# EAGLE board Arduino_lab_v1.2.brd.2 (EAGLE 7.2.0), part 1 of 2
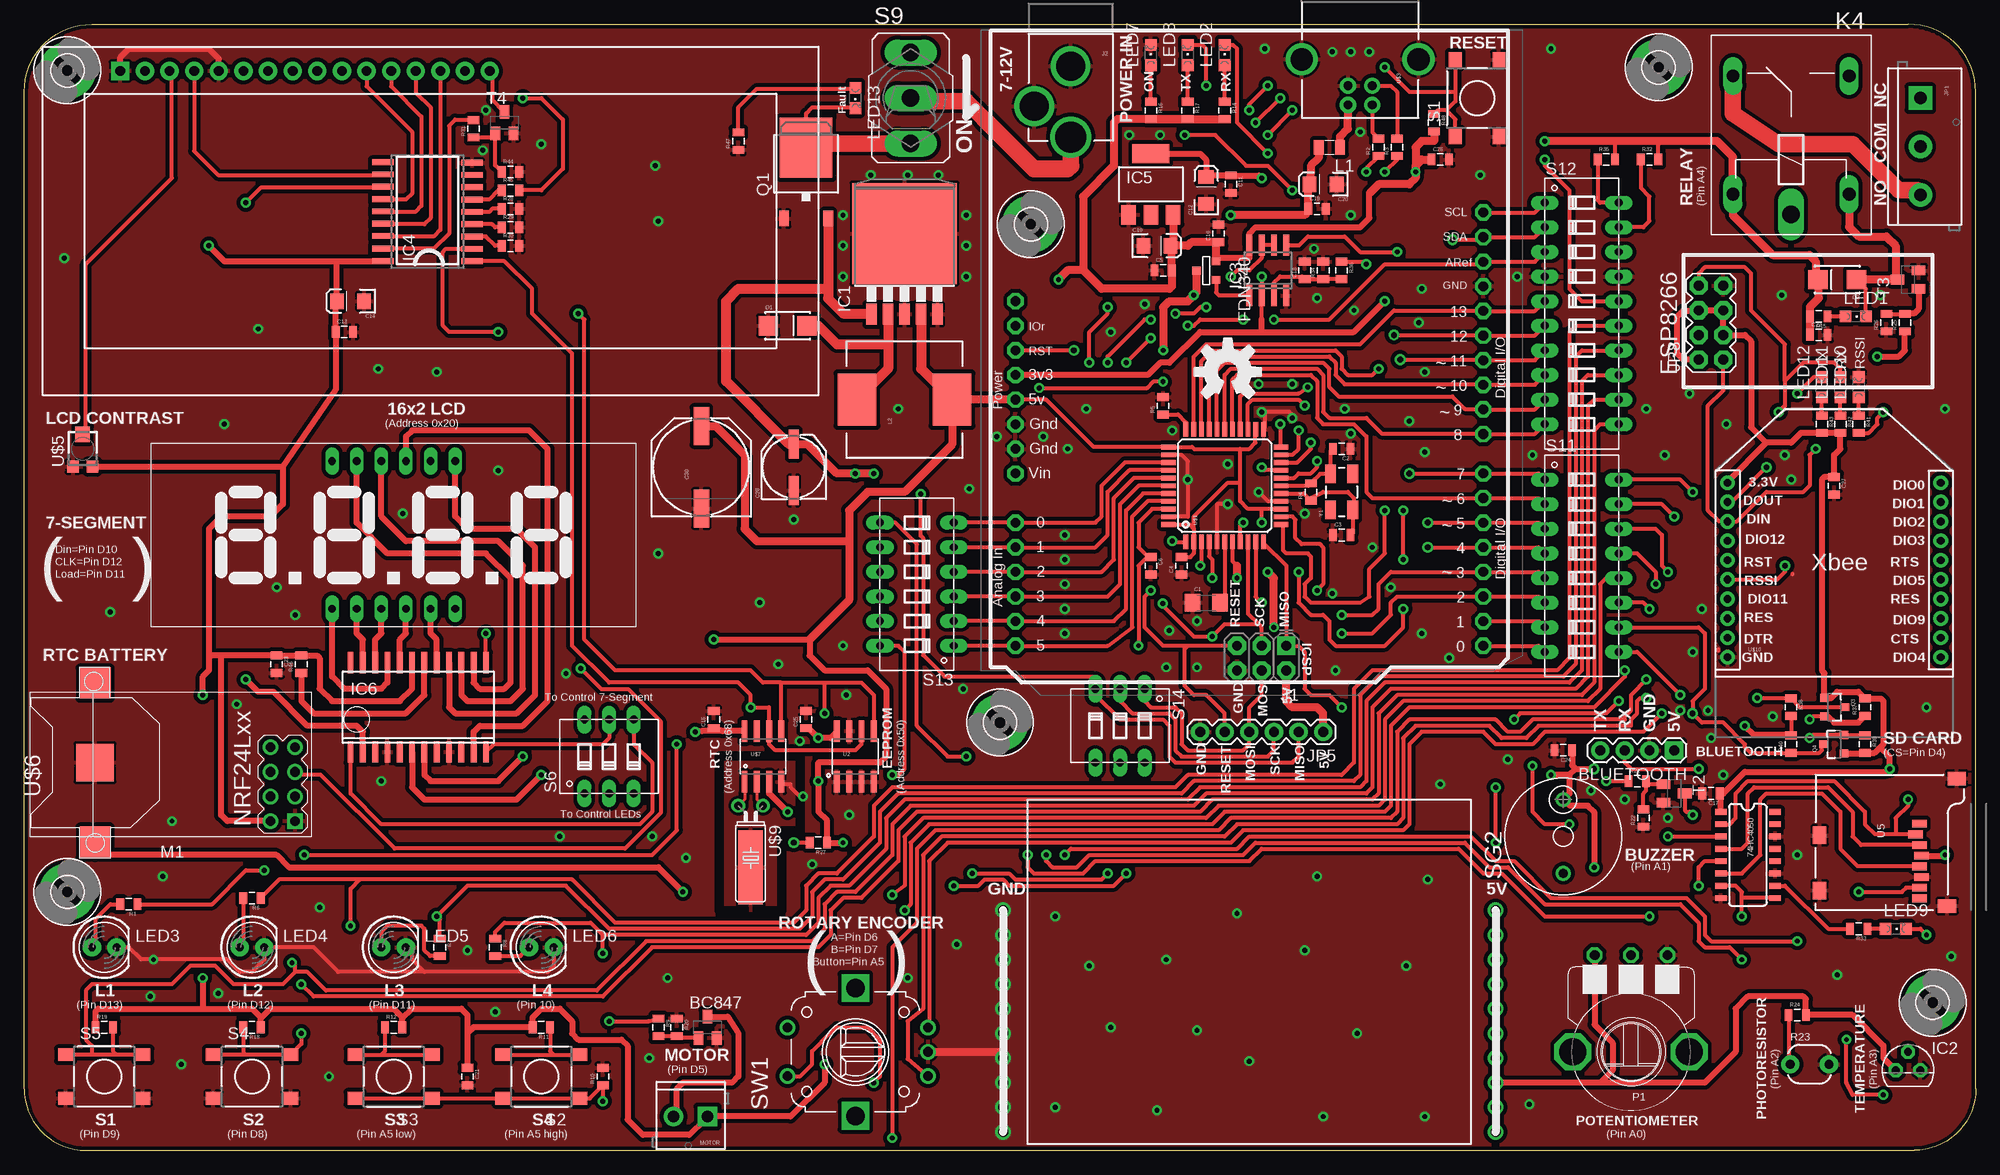
[diagram p0: board, top side]
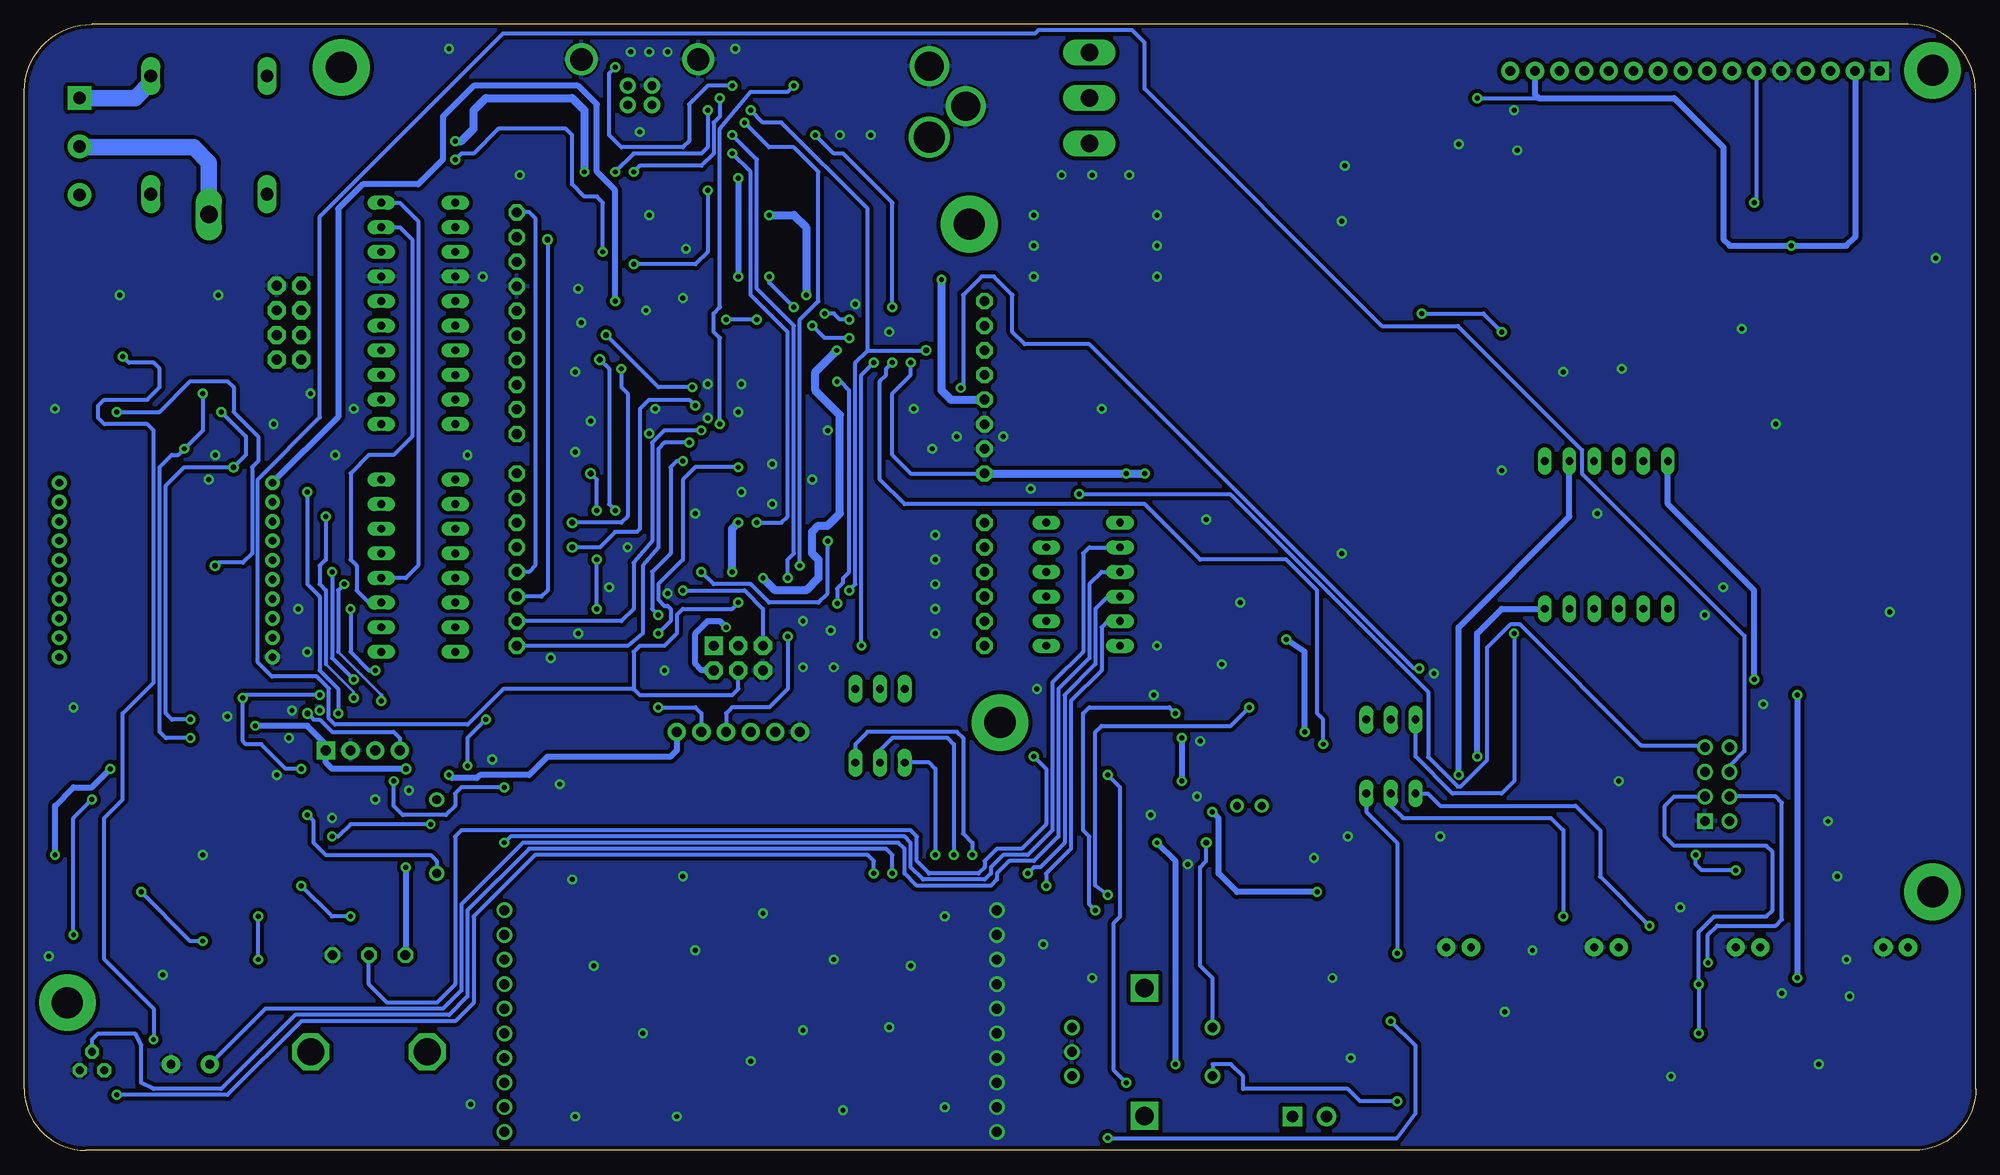
[diagram p1: board, bottom side, seen from below]

Size 201.29 x 116.2 mm. Coordinates in mm from the lower left corner, seen from the top.
Outline: 201.28,6.35 201.28,109.52
Outline: 201.29,6.35 arc-90 194.94,0 6.35,0 arc-90 0,6.35 0,109.22 arc-90 6.99,116.2 194.31,116.2 arc-90 201.29,109.22
Copper layers (1*16): Top 0.035mm / dielectric 1.5mm / Bottom 0.035mm
Design rules "default": minimum track width 16mil, minimum drill 20mil, track to track 8mil, track to pad 12mil, pad to pad 8mil, via to via 8mil, smd to smd 8mil, copper to edge 10mil, drill to drill 8mil, minimum pad ring 12mil, minimum via ring 10mil, stop-mask expansion 4mil, vias tented up to drill 25mil, thermal gap 10mil
tRestrict: 7 lines

## Footprints (pad centres in the part's own frame; a part is rotated, then mirrored left to right if it is on the bottom)
SO016 = smd 0.6 x 1.2: 1 -4.445,-2.8; 2 -3.175,-2.8; 3 -1.905,-2.8; 4 -0.635,-2.8; 5 0.635,-2.8; 6 1.905,-2.8; 7 3.175,-2.8; 8 4.445,-2.8; 9 4.445,2.8; 10 3.175,2.8; 11 1.905,2.8; 12 0.635,2.8; 13 -0.635,2.8; 14 -1.905,2.8; 15 -3.175,2.8; 16 -4.445,2.8
SOT23-BEC = smd 1 x 1.4: B -0.95,-1.1; C 0,1.1; E 0.95,-1.1
1X04 = drill 1.016 pad 1.88 square: 1 0,0 | drill 1.016 pad 1.88: 2 2.54,0; 3 5.08,0; 4 7.62,0
1206 = smd 1.6 x 1.8: 1 -1.4,0; 2 1.4,0
0805 = smd 0.8 x 1.2: 1 -0.9,0; 2 0.9,0
EIA3216 = smd 1.4 x 1.6: A 1.4,0; C -1.4,0
NIPPON_F80 = smd 2.95 x 1: + 2.4,0; - -2.4,0
PANASONIC_G = smd 3.9 x 1.6: + 4.25,0; - -4.25,0
SMA-DIODE_ALT = smd 2 x 2: A -2,0; C 2,0
SOT-23 = smd 0.787 x 0.889: 1 0.025,-1.016; 2 -0.94,1.016; 3 0.991,1.016
3,2-PAD = drill 3.2 pad 5.842: B3,2 0,0
TO263-5 = smd 1.067 x 2.159: 1 -3.404,-5.791; 2 -1.702,-5.791; 3 0,-5.791; 4 1.702,-5.791; 5 3.404,-5.791 | smd 10.8 x 10.41: GND 0,2.54
TO92 = drill 0.813 octagon: 1 -1.27,0; 2 0,1.905; 3 1.27,0
SO08 = smd 0.6 x 2.2: 1 -1.905,-2.6; 2 -0.635,-2.6; 3 0.635,-2.6; 4 1.905,-2.6; 5 1.905,2.6; 6 0.635,2.6; 7 -0.635,2.6; 8 -1.905,2.6
SO18W = smd 0.6 x 2.2: 1 -4.445,-4.6; 2 -3.175,-4.6; 3 -1.905,-4.6; 4 -0.635,-4.6; 5 0.635,-4.6; 6 1.905,-4.6; 7 3.175,-4.6; 8 4.445,-4.6; 9 5.715,-4.6; 10 5.775,4.6; 11 4.505,4.6; 12 3.235,4.6; 13 1.965,4.6; 14 0.695,4.6; 15 -0.575,4.6; 16 -1.845,4.6; 17 -3.145,4.6; 18 -4.445,4.6
SOT223 = smd 1.5 x 2: 1 -2.3,-3.15; 2 0,-3.15; 3 2.3,-3.15 | smd 3.8 x 2: 4 0,3.15
SO24W = smd 0.6 x 2.2: 1 -6.985,-4.6; 2 -5.715,-4.6; 3 -4.445,-4.6; 4 -3.175,-4.6; 5 -1.905,-4.6; 6 -0.635,-4.6; 7 0.635,-4.6; 8 1.905,-4.6; 9 3.175,-4.6; 10 4.445,-4.6; 11 5.715,-4.6; 12 6.985,-4.6; 13 6.985,4.6; 14 5.715,4.6; 15 4.445,4.6; 16 3.175,4.6; 17 1.905,4.6; 18 0.635,4.6; 19 -0.635,4.6; 20 -1.905,4.6; 21 -3.175,4.6; 22 -4.445,4.6; 23 -5.715,4.6; 24 -6.985,4.6
2X3-NS = drill 1.016 pad 1.88 square: 1 -2.54,-1.27 | drill 1.016 pad 1.88 octagon: 2 -2.54,1.27; 3 0,-1.27; 4 0,1.27; 5 2.54,-1.27; 6 2.54,1.27
POWER_JACK_PTH_LOCK = drill 2.997 pad 4.115: GND 0.025,6.557; GNDBREAK 3.762,10.7 | drill 3.2 pad 4.115: PWR 0,13.878
SCREWTERMINAL-5MM-3 = drill 1.3 pad 2.413 square: 1 0,0 | drill 1.3 pad 2.413: 2 5,0; 3 10,0
1X06 = drill 1.016 pad 1.88: 1 0,0; 2 2.54,0; 3 5.08,0; 4 7.62,0; 5 10.16,0; 6 12.7,0
2X4 = drill 1.016 pad 1.88 octagon: 1 -3.81,-1.27; 2 -3.81,1.27; 3 -1.27,-1.27; 4 -1.27,1.27; 5 1.27,-1.27; 6 1.27,1.27; 7 3.81,-1.27; 8 3.81,1.27
ZF112 = drill 1.321 long: 1 -6.096,5.994; 2 -6.096,-5.994; O 6.096,5.994; S 6.096,-5.994 | drill 1.803 long: P -8.204,0
PTC0805 = smd 1 x 1.5: 1 -1.1,0; 2 1.1,0
CDRH125 = smd 5.4 x 4: 1 0,4.9; 2 0,-4.9
CHIPLED_0805 = smd 1.2 x 1.2: A 0,-1.05; C 0,1.05
LED5MM = drill 0.813 pad 1.88: A -1.27,0; K 1.27,0
WIRELESS-NRF24L01 = drill 1 square: 1 -12.7,6.35 | drill 1: 2 -10.16,6.35; 3 -12.7,3.81; 4 -10.16,3.81; 5 -12.7,1.27; 6 -10.16,1.27; 7 -12.7,-1.27; 8 -10.16,-1.27
SCREWTERMINAL-3.5MM-2 = drill 1.2 pad 2.032 square: 1 0,0 | drill 1.2 pad 2.032: 2 3.5,0
P120PK = drill 1 octagon: A -3.75,-10; E 3.75,-10; S 0,-10 | drill 2.8 octagon: M1 -6,0; M2 6,0
TO252 = smd 1 x 1.6: 1 -2.28,-4.8; 2 2.28,-4.8 | smd 5.4 x 6.2: 3 0,2.5
SOT23-3 = smd 0.8 x 0.9: 1 -0.95,-1; 2 0.95,-1; 3 0,1.1
PHOTOCELL-KIT = drill 0.9 pad 1.88: 1 -2,0; 2 2,0
DTSM-6 = smd 1.55 x 1.3: 1 -3.975,2.25; 2 3.975,2.25; 3 -3.975,-2.25; 4 3.975,-2.25
DIP03YL = drill 0.813 long: 1 -2.54,-3.81; 2 0,-3.81; 3 2.54,-3.81; 4 2.54,3.81; 5 0,3.81; 6 -2.54,3.81
M9040P = drill 1.803 long: 1 0,4.699; 2 0,0; 3 0,-4.699
DIP08YL = drill 0.813 long: 1 -8.89,-3.81; 2 -6.35,-3.81; 3 -3.81,-3.81; 4 -1.27,-3.81; 5 1.27,-3.81; 6 3.81,-3.81; 7 6.35,-3.81; 8 8.89,-3.81; 9 8.89,3.81; 10 6.35,3.81; 11 3.81,3.81; 12 1.27,3.81; 13 -1.27,3.81; 14 -3.81,3.81; 15 -6.35,3.81; 16 -8.89,3.81
DIP10YL = drill 0.813 long: 1 -11.43,-3.81; 2 -8.89,-3.81; 3 -6.35,-3.81; 4 -3.81,-3.81; 5 -1.27,-3.81; 6 1.27,-3.81; 7 3.81,-3.81; 8 6.35,-3.81; 9 8.89,-3.81; 10 11.43,-3.81; 11 11.43,3.81; 12 8.89,3.81; 13 6.35,3.81; 14 3.81,3.81; 15 1.27,3.81; 16 -1.27,3.81; 17 -3.81,3.81; 18 -6.35,3.81; 19 -8.89,3.81; 20 -11.43,3.81
DIP06YL = drill 0.813 long: 1 -6.35,-3.81; 2 -3.81,-3.81; 3 -1.27,-3.81; 4 1.27,-3.81; 5 3.81,-3.81; 6 6.35,-3.81; 7 6.35,3.81; 8 3.81,3.81; 9 1.27,3.81; 10 -1.27,3.81; 11 -3.81,3.81; 12 -6.35,3.81
BMT1205XH7.5 = drill 0.9 pad 1.5: + 3.8,0; - -3.8,0
PEC12_INCREMENTAL_ENCODER = drill 1: A -2.5,-7.5; B 2.5,-7.5; C 0,-7.5; P1 -2.5,7; P2 2.5,7 | drill 1.9 square: GND@1 -6.6,0; GND@2 6.6,0
LCD-16X2 = drill 1.016 pad 1.88 square: 1 -32,15.5 | drill 1.016 pad 1.88: 2 -29.46,15.5; 3 -26.92,15.5; 4 -24.38,15.5; 5 -21.84,15.5; 6 -19.3,15.5; 7 -16.76,15.5; 8 -14.22,15.5; 9 -11.68,15.5; 10 -9.14,15.5; 11 -6.6,15.5; 12 -4.06,15.5; 13 -1.52,15.5; 14 1.02,15.5; 15 3.56,15.5; 16 6.1,15.5
SO08' = smd 0.61 x 2.21: 1 -1.905,-2.616; 2 -0.635,-2.616; 3 0.635,-2.616; 4 1.905,-2.616; 5 1.905,2.616; 6 0.635,2.616; 7 -0.635,2.616; 8 -1.905,2.616
MICRO-SD-SOCKET-PP = smd 0.8 x 1.5: 1 -8.94,10.7; 2 -7.84,10.3; 3 -6.74,10.7; 4 -5.64,10.9; 5 -4.54,10.7; 6 -3.44,10.9; 7 -2.34,10.7; 8 -1.24,10.7 | smd 1.8 x 1.4: CD1 -2.05,0.4; CD2 -7.75,0.4 | smd 1.4 x 1.9: GND1 -13.6,14.55; GND3 -0.45,13.55
TQFP44 = smd 1.5 x 0.5: 1 -5.8,4; 2 -5.8,3.2; 3 -5.8,2.4; 4 -5.8,1.6; 5 -5.8,0.8; 6 -5.8,0; 7 -5.8,-0.8; 8 -5.8,-1.6; 9 -5.8,-2.4; 10 -5.8,-3.2; 11 -5.8,-4; 23 5.8,-4; 24 5.8,-3.2; 25 5.8,-2.4; 26 5.8,-1.6; 27 5.8,-0.8; 28 5.8,0; 29 5.8,0.8; 30 5.8,1.6; 31 5.8,2.4; 32 5.8,3.2; 33 5.8,4 | smd 0.5 x 1.5: 12 -4,-5.8; 13 -3.2,-5.8; 14 -2.4,-5.8; 15 -1.6,-5.8; 16 -0.8,-5.8; 17 0,-5.8; 18 0.8,-5.8; 19 1.6,-5.8; 20 2.4,-5.8; 21 3.2,-5.8; 22 4,-5.8; 34 4,5.8; 35 3.2,5.8; 36 2.4,5.8; 37 1.6,5.8; 38 0.8,5.8; 39 0,5.8; 40 -0.8,5.8; 41 -1.6,5.8; 42 -2.4,5.8; 43 -3.2,5.8; 44 -4,5.8
USB-B-PTH = drill 0.914 pad 1.676: D+ 0,1.25; D- 1.981,1.25; GND 0,-1.25; VBUS 1.981,-1.25 | drill 2.286: S1 -2.718,-6.02; S2 -2.718,6.02
UNO_R3 = drill 1 pad 1.676 octagon: 3V 35.56,2.54; 5V 38.1,2.54; A0 50.8,2.54; A1 53.34,2.54; A2 55.88,2.54; A3 58.42,2.54; A4 60.96,2.54; A5 63.5,2.54; AREF 23.876,50.8; D0 63.5,50.8; D1 60.96,50.8; D2 58.42,50.8; D3 55.88,50.8; D4 53.34,50.8; D5 50.8,50.8; D6 48.26,50.8; D7 45.72,50.8; D8 41.656,50.8; D9 39.116,50.8; D10 36.576,50.8; D11 34.036,50.8; D12 31.496,50.8; D13 28.956,50.8; GND 26.416,50.8; GND1 43.18,2.54; GND2 40.64,2.54; IOREF 30.48,2.54; RESERVED 27.94,2.54; RESET 33.02,2.54; SCL 18.796,50.8; SDA 21.336,50.8; VIN 45.72,2.54
TC33X = smd 1.2 x 1.2: 1 -1,-1.825; 3 1,-1.825 | smd 1.5 x 1.6: 2 0,1.5
CR1220-SMD = smd 3.2 x 3.2: +$1 -8.2,0; +$2 8.2,0 | smd 3.9 x 3.9: - 0,0
TC38H_GNDPAD = drill 0.813: 1 -1.27,0; 2 1.27,0 | smd 2.54 x 7.62: P$1 0,6.35
XBEE-SILK = drill 0.8 pad 1.524: 1 -11,20; 2 -11,18; 3 -11,16; 4 -11,14; 5 -11,12; 6 -11,10; 7 -11,8; 8 -11,6; 9 -11,4; 10 -11,2; 11 11,2; 12 11,4; 13 11,6; 14 11,8; 15 11,10; 16 11,12; 17 11,14; 18 11,16; 19 11,18; 20 11,20
MYLIB_LDQ_4D_7SEG = drill 0.8 long: 1 -6.35,-7.62; 2 -3.81,-7.62; 3 -1.27,-7.62; 4 1.27,-7.62; 5 3.81,-7.62; 6 6.35,-7.62; 7 6.35,7.62; 8 3.81,7.62; 9 1.27,7.62; 10 -1.27,7.62; 11 -3.81,7.62; 12 -6.35,7.62
CRYSTAL-SMD-5X3 = smd 1.9 x 1.1: 1 -1.85,-1.15; 2 1.85,-1.15; 3 1.85,1.15; 4 -1.85,1.15

## Placement (x,y rotation side)
74HC4050  HEX_CONVERTER  [SO016]  177.8,30.48 270 top
BC847  [SOT23-BEC]  70.48,12.7 0 top
BLUETOOTH  [1X04]  170.18,41.28 180 top
C1  1uF  [1206]  121.92,56.52 0 top
C2  22pF  [0805]  135.89,72.39 180 top
C3  22pF  [0805]  135.89,63.5 0 top
C4  100nF  [0805]  119.38,60.33 90 top
C5  100nF  [0805]  117.48,90.8 0 top
C6  100nF  [0805]  116.21,60.33 270 top
C10  10uF  [EIA3216]  116.84,93.34 0 top
C11  100nF  [0805]  124.46,99.69 270 top
C12  10uF  [EIA3216]  121.92,99.06 90 top
C13  100nf  [0805]  33.02,84.45 0 top
C14  10uf  [EIA3216]  33.66,87.63 180 top
C15  100nF  [0805]  71.12,44.45 90 top
C16  100nF  [0805]  123.19,94.61 90 top
C17  100nF  [0805]  173.99,36.83 180 top
C18  100nF  [0805]  132.08,90.8 90 top
C19  100nF  [0805]  133.35,97.16 0 top
C20  10uF  [EIA3216]  133.98,99.69 180 top
C21  100n  [0805]  45.72,7.62 270 top
C22  100nF  [0805]  185.1,84.14 0 top
C23  100nf  [0805]  26.04,50.17 270 top
C24  100nF  [0805]  158.75,41.28 180 top
C25  100n  [0805]  80.65,44.45 90 top
C26  100nF  [0805]  146.05,102.23 0 top
C27  100nF  [0805]  186.69,68.58 270 top
C28  100uF  [NIPPON_F80]  79.38,70.48 90 top
C30  470uF  [PANASONIC_G]  69.85,70.48 90 top
D1  1N4007  [SMA-DIODE_ALT]  78.74,85.09 0 top
D2  1N4007  [SMA-DIODE_ALT]  187.01,89.85 180 top
FDN340  [SOT-23]  121.92,90.8 270 top
H1  MOUNT-PAD-ROUND3.2  [3,2-PAD]  4.45,26.67 0 top
H2  MOUNT-PAD-ROUND3.2  [3,2-PAD]  100.65,44.13 0 top
H3  MOUNT-PAD-ROUND3.2  [3,2-PAD]  196.85,15.24 0 top
H4  MOUNT-PAD-ROUND3.2  [3,2-PAD]  168.59,111.76 0 top
H5  MOUNT-PAD-ROUND3.2  [3,2-PAD]  4.45,111.44 0 top
H6  MOUNT-PAD-ROUND3.2  [3,2-PAD]  103.82,95.57 0 top
IC1  LM2575S  [TO263-5]  90.81,92.08 0 top
IC2  LM35CZ  [TO92]  194.31,8.26 0 top
IC3  LM358MX  [SO08]  128.27,90.8 0 top
IC4  MCP2300X/SO  [SO18W]  41.59,96.2 90 top
IC5  LD117AS33TR  [SOT223]  116.21,99.69 0 top
IC6  MAX7219CWG  [SO24W]  40.64,45.72 0 top
J1  AVR_SPI_PRG_6NS  [2X3-NS]  127.64,50.8 180 top
J2  POWER_JACKPTH_LOCK  [POWER_JACK_PTH_LOCK]  107.95,118.43 180 top
JP1  [SCREWTERMINAL-5MM-3]  195.58,108.58 270 top
JP5  [1X06]  133.98,43.18 180 top
JP8  [2X4]  173.99,85.41 90 top
K4  ZF112  [ZF112]  182.25,104.77 90 top
L1  [PTC0805]  134.62,103.5 180 top
L2  [CDRH125]  90.81,77.47 90 top
LED1  Blue  [CHIPLED_0805]  188.91,86.04 270 top
LED2  Green  [CHIPLED_0805]  123.83,113.03 0 top
LED3  [LED5MM]  8.25,20.95 0 top
LED4  [LED5MM]  23.49,20.95 0 top
LED5  [LED5MM]  38.1,20.95 0 top
LED6  [LED5MM]  53.34,20.95 0 top
LED7  Yellow  [CHIPLED_0805]  116.21,113.03 0 top
LED8  Green  [CHIPLED_0805]  120.02,113.03 0 top
LED9  Blue  [CHIPLED_0805]  193.04,22.86 270 top
LED10  Yellow  [CHIPLED_0805]  189.23,78.74 0 top
LED11  Red  [CHIPLED_0805]  187.32,78.74 0 top
LED12  Blue  [CHIPLED_0805]  185.42,78.74 0 top
LED13  Red  [CHIPLED_0805]  85.73,108.58 180 top
M1  WIRELESS-NRF24L01  [WIRELESS-NRF24L01]  15.24,40.32 180 top
MOTOR  [SCREWTERMINAL-3.5MM-2]  70.48,3.49 180 top
P1  P120PK  [P120PK]  165.73,10.16 180 top
Q1  FDD4141 or FDD6637  [TO252]  80.65,100.96 0 top
Q3  BSS138  [SOT23-3]  186.69,45.72 270 top
Q4  BSS138  [SOT23-3]  186.69,41.91 90 top
R1  330  [0805]  10.8,25.4 180 top
R2  22  [0805]  139.7,103.5 90 top
R3  22  [0805]  141.6,103.5 90 top
R4  1M  [0805]  132.72,67.94 90 top
R5  10K  [0805]  117.48,76.83 90 top
R6  330  [0805]  23.49,26.04 180 top
R7  330  [0805]  42.86,20.95 270 top
R8  330  [0805]  48.58,20.95 270 top
R9  1k  [0805]  65.41,12.7 270 top
R10  1k  [0805]  59.69,7.62 90 top
R11  1k  [0805]  53.34,12.7 180 top
R12  3.9k  [0805]  38.1,12.7 0 top
R14  330  [0805]  123.83,107.31 270 top
R15  1k  [0805]  185.1,86.04 180 top
R16  330  [0805]  116.21,107.31 270 top
R17  330  [0805]  120.02,107.31 270 top
R18  10k  [0805]  23.49,12.7 180 top
R19  10k  [0805]  8.25,12.7 0 top
R20  10k  [0805]  67.31,12.7 270 top
R21  1k  [0805]  166.37,38.1 0 top
R22  10k  [0805]  167,34.29 90 top
R23  PHOTOCELLPTH-KIT  [PHOTOCELL-KIT]  184.15,8.89 0 top
R24  10k  [0805]  182.88,13.97 0 top
R25  1k  [0805]  193.99,85.41 90 top
R26  10k  [0805]  192.09,85.41 90 top
R27  10k  [0805]  81.92,31.75 180 top
R28  10k  [0805]  50.16,97.16 0 top
R29  10k  [0805]  50.16,95.25 0 top
R30  10k  [0805]  50.16,93.34 0 top
R31  1k  [0805]  46.35,105.41 90 top
R32  4.7k  [0805]  167.64,102.23 0 top
R33  1k  [0805]  189.23,22.86 180 top
R34  10K  [0805]  133.98,90.8 90 top
R35  4.7k  [0805]  163.19,102.23 0 top
R36  10K  [0805]  135.89,90.8 270 top
R37  10K  [0805]  189.86,45.72 90 top
R38  10K  [0805]  182.25,45.72 270 top
R39  10K  [0805]  189.86,41.91 270 top
R40  10K  [0805]  182.25,41.91 90 top
R41  1K  [0805]  189.23,74.93 270 top
R42  1K  [0805]  187.32,74.93 270 top
R43  1K  [0805]  185.42,74.93 270 top
R44  10k  [0805]  50.16,100.96 0 top
R45  10k  [0805]  50.16,99.06 0 top
R46  30k civari  [0805]  28.57,50.17 90 top
R47  1k  [0805]  73.66,104.14 90 top
R48  10k  [0805]  145.41,106.05 270 top
S1  DTSM-6  [DTSM-6]  149.86,108.58 90 top
S2  DTSM-6  [DTSM-6]  53.34,7.62 180 top
S3  DTSM-6  [DTSM-6]  38.1,7.62 180 top
S4  DTSM-6  [DTSM-6]  23.49,7.62 0 top
S5  DTSM-6  [DTSM-6]  8.25,7.62 0 top
S6  [DIP03YL]  60.32,40.64 0 top
S9  [M9040P]  91.44,108.58 0 top
S11  [DIP08YL]  160.66,60.33 270 top
S12  [DIP10YL]  160.66,86.36 270 top
S13  [DIP06YL]  92.08,58.42 90 top
S14  [DIP03YL]  113.03,43.82 180 top
SG2  BMT1205XH7.5  [BMT1205XH7.5]  158.75,32.38 90 top
SW1  ENCODER_SW1-PEC12  [PEC12_INCREMENTAL_ENCODER]  85.73,10.16 90 top
T2  [SOT23-BEC]  170.18,36.83 270 top
T3  [SOT23-BEC]  194.31,89.85 90 top
T4  [SOT23-BEC]  49.53,106.05 0 top
U1  LCD-16X2SILK  [LCD-16X2]  41.91,95.88 0 top
U2  24LC256  [SO08']  85.73,40.64 0 top
U5  USD-SOCKETNEW  [MICRO-SD-SOCKET-PP]  184.78,24.77 270 top
U$1  ATMEGA32U4TQFP-44  [TQFP44]  123.83,68.58 90 top
U$2  BREADBOARDMINI  [BREADBOARD-MINI]  149.22,36.2 180 top
U$3  USB+SHIELD  [USB-B-PTH]  137.79,109.85 270 top
U$4  UNO_R3  [UNO_R3]  99.7,115.57 270 top
U$5  10k  [TC33X]  6.03,72.39 0 top
U$6  [CR1220-SMD]  7.3,40.01 90 top
U$7  DS1307SO8  [SO08']  76.2,40.64 0 top
U$8  [INDIEGOGO_FONT_LOGO]  183.2,-0.32 0 top
U$9  CRYSTAL_GNDPAD  [TC38H_GNDPAD]  74.93,35.56 180 top
U$10  XBEE-1B2  [XBEE-SILK]  186.69,48.9 0 top
U$11  [TINYLAB_LOGO_LARGE]  31.11,22.54 0 top
U$13  MYLIB_LCQ_4D_7SEG  [MYLIB_LDQ_4D_7SEG]  38.1,63.5 0 top
U$14  [OSHW-LOGO-L]  124.14,80.33 0 top
Y1  16Mhz  [CRYSTAL-SMD-5X3]  135.89,67.94 90 top

## Library data of the parts
74HC4050 BLUETOOTH C1-C6 C10-C28 C30 D1 D2 J1 J2 JP1 JP5 L2 LED3-LED6 MOTOR Q3 Q4 R1-R12 R14-R48 U1 U5 U$2 U$3 U$7 U$10 Y1 = SparkFun
BC847 T2-T4 = transistor
FDN340 = zetex; OC_FARNELL: unknown; OC_NEWARK: unknown
H1-H6 = holes
IC1 = v-reg-3
IC2 = lm35
IC3 = linear
IC4 U$5 U$6 = adafruit
IC5 = v-reg
IC6 = maxim-10
JP8 = SparkFun-Connectors
K4 = relay; OC_FARNELL: unknown; OC_NEWARK: unknown
L1 SW1 = dp_devices
LED1 LED2 LED7-LED13 = led
M1 = diy-modules
P1 = pot-tt_electronics
Q1 = transistor-fet
S1-S5 = switch-tact
S6 S11-S14 = switch-dil; OC_FARNELL: unknown; OC_NEWARK: unknown
S9 = switch
SG2 = buzzer; OC_FARNELL: unknown; OC_NEWARK: unknown
U2 U$1 = SparkFun-DigitalIC
U$4 = UNO_R3
U$8 U$11 = tinylab_logo
U$9 = crystal
U$13 = 4_Digit_DIsplay
U$14 = SparkFun-Aesthetics

## Nets
3.3V: 74HC4050.1 C11.1 C12.A C17.1 C27.1 IC3.2 IC5.4 JP8.2 JP8.3 JP8.5 JP8.6 Q3.1 Q4.1 R37.2 R39.2 R42.2 R43.2 U5.4 U$4.3V U$10.1
4: S11.4 U$1.25 U$4.D4
5: S11.3 U$1.31 U$4.D5
6: S11.2 U$1.27 U$4.D6
7: S11.1 U$1.1 U$4.D7
8: S12.10 U$1.28 U$4.D8
9: S12.9 U$1.29 U$4.D9
10: S12.8 U$1.30 U$4.D10
11: S12.7 U$1.12 U$4.D11
12: S12.6 U$1.26 U$4.D12
13: S12.5 U$1.32 U$4.D13
!RESET: J1.5 JP5.5 R48.1 S1.1 S1.2 U$1.13 U$4.RESET
+5V: BLUETOOTH.1 C4.2 C5.2 C10.A C13.1 C14.A C15.1 C16.1 C21.1 C22.1 C23.1 C24.1 C25.1 C26.1 C30.+ D2.C FDN340.2 IC1.4 IC2.1 IC3.8 IC4.18 IC5.3 IC6.19 J1.2 JP5.1 K4.1 L2.2 M1.2 MOTOR.1 P1.E R11.2 R12.2 R14.2 R15.2 R16.2 R17.2 R18.1 R19.1 R24.2 R27.1 R32.2 R35.2 R38.2 R40.2 R45.2 R46.2 R48.2 SG2.+ U1.2 U1.15 U2.8 U$1.2 U$1.14 U$1.24 U$1.34 U$1.44 U$4.5V U$5.3 U$7.8
A0: P1.S S13.7
A1: R21.1 S13.8
A2: R23.1 R24.1 S13.9
A3: IC2.2 S13.10
A4: R25.1 S13.11
A5: R10.1 S2.1 S2.2 S3.1 S3.2 S13.12 SW1.P1
A_A0: S13.6 U$1.36 U$4.A0
A_A1: S13.5 U$1.37 U$4.A1
A_A2: S13.4 U$1.38 U$4.A2
A_A3: S13.3 U$1.39 U$4.A3
A_A4: S13.2 U$1.40 U$4.A4
A_A5: S13.1 U$1.41 U$4.A5
A_AREF: C6.1 S12.3 U$1.42 U$4.AREF
A_MISO: J1.1 JP5.2 M1.7 S14.3 U$1.11
A_MOSI: J1.4 JP5.4 M1.6 S14.1 U$1.10
A_RX: S11.8 U$1.20 U$4.D0
A_SCK: J1.3 JP5.3 M1.5 S14.2 U$1.9
A_SCL: S11.5 S12.1 U$1.18 U$4.D3 U$4.SCL
A_SDA: S11.6 S12.2 U$1.19 U$4.D2 U$4.SDA
A_TX: S11.7 U$1.21 U$4.D1
AREF: S12.18
CTS: U$10.12
D4: 74HC4050.3 S11.13
D5: R9.1 S11.14
D6: S11.15 SW1.A
D7: S11.16 SW1.B
D8: M1.3 R18.2 S4.1 S4.2 S12.11
D9: M1.4 R19.2 S5.1 S5.2 S12.12
D10: R8.1 S6.3 S12.13
D11: R7.1 S6.2 S12.14
D12: R6.1 S6.1 S12.15
D13: IC3.5 S12.16
D+: R3.1 U$1.4
D-: R2.1 U$1.3
DB4: IC4.13 U1.11
DB5: IC4.14 U1.12
DB6: IC4.15 U1.13
DB7: IC4.16 U1.14
DIN: JP8.1 LED12.C Q4.2 R39.1 U$10.3
DIO0: U$10.20
DIO1: U$10.19
DIO2: U$10.18
DIO3: U$10.17
DIO4: U$10.11
DIO5: U$10.15
DIO9: U$10.13
DIO11: U$10.7
DIO12: U$10.4
DOUT: JP8.8 LED11.C Q3.2 R37.1 U$10.2
DTR: U$10.9
E: IC4.12 U1.6
GND: 74HC4050.8 74HC4050.11 74HC4050.14 BC847.E BLUETOOTH.2 C1.1 C2.1 C3.1 C4.1 C5.1 C6.2 C10.C C11.2 C12.C C13.2 C14.C C15.2 C16.2 C17.2 C18.2 C19.2 C20.C C21.2 C22.2 C23.2 C24.2 C25.2 C26.2 C27.2 C28.- C30.- D1.A IC1.3 IC1.5 IC1.GND IC2.3 IC3.4 IC4.9 IC5.1 IC6.4 IC6.9 J1.6 J2.GND J2.GNDBREAK JP5.6 JP8.7 LED3.K LED4.K LED5.K LED6.K LED7.C LED10.C M1.1 P1.A Q1.1 R5.2 R10.2 R20.1 R22.1 R23.2 R26.1 R28.2 R29.2 R30.2 R34.2 R44.2 R47.1 S1.3 S1.4 S4.3 S4.4 S5.3 S5.4 S12.4 S12.17 SW1.C T2.E T3.E T4.E U1.1 U1.5 U2.1 U2.2 U2.3 U2.4 U2.7 U5.6 U5.CD1 U5.CD2 U5.GND1 U5.GND3 U$1.5 U$1.15 U$1.23 U$1.35 U$1.43 U$3.GND U$3.S1 U$3.S2 U$4.GND U$4.GND1 U$4.GND2 U$5.1 U$6.- U$7.4 U$9.P$1 U$10.10
IOREF: U$4.IOREF
LED: 74HC4050.10 R33.2
LIGHT: IC4.17 R31.2
MISO: S14.4 U5.7
MOSI: 74HC4050.5 S14.6
N$1: R2.2 U$3.D-
N$2: R3.2 U$3.D+
N$3: LED3.A R1.2
N$4: C1.2 U$1.6
N$5: R11.1 S2.3 S2.4
N$6: C3.2 R4.1 U$1.16 Y1.1
N$7: C2.2 R4.2 U$1.17 Y1.3
N$8: R21.2 R22.2 T2.B
N$9: R5.1 U$1.33
N$10: D1.C IC1.2 L2.1
N$11: R12.1 S3.3 S3.4
N$12: BC847.B R9.2 R20.2
N$13: LED4.A R6.2
N$14: JP1.3 K4.O
N$15: LED5.A R7.2
N$16: BC847.C MOTOR.2
N$17: LED6.A R8.2
N$18: SG2.- T2.C
N$19: LED1.A R15.1
N$20: R25.2 R26.2 T3.B
N$21: D2.A K4.2 LED1.C T3.C
N$22: LED2.A R14.1
N$23: LED8.A R17.1
N$24: JP1.2 K4.P
N$25: JP1.1 K4.S
N$26: J2.PWR S9.2
N$27: LED13.C Q1.3 S9.3
N$28: U$4.RESERVED
N$29: IC4.5 R28.1
N$30: IC4.4 R29.1
N$31: IC4.3 R30.1
N$32: R27.2 SW1.P2
N$33: R31.1 R44.1 T4.B
N$34: U1.3 U$5.2
N$35: T4.C U1.16
N$36: U$7.2 U$9.1
N$37: U$6.+$1 U$7.3
N$38: IC6.14 U$13.11
N$39: 74HC4050.4 U5.3
N$40: 74HC4050.6 U5.5
N$41: U$7.1 U$9.2
N$42: LED9.A R33.1
N$43: 74HC4050.2 LED9.C U5.2
N$44: L1.1 U$3.VBUS
N$45: C18.1 IC3.3 R34.1 R36.2
N$46: LED10.A R41.1
N$47: FDN340.3 IC3.1
N$48: IC3.6 IC3.7 R1.1
N$49: LED11.A R42.1
N$50: LED12.A R43.1
N$51: LED13.A R47.2
N$52: IC4.6 R45.1
N$53: IC6.18 R46.1
N$54: IC6.16 U$13.7
N$55: IC6.20 U$13.4
N$56: IC6.23 U$13.2
N$57: IC6.21 U$13.1
N$58: IC6.15 U$13.10
N$59: IC6.17 U$13.5
N$60: IC6.22 U$13.3
N$61: IC6.7 U$13.6
N$62: IC6.6 U$13.8
N$63: IC6.11 U$13.9
N$64: IC6.2 U$13.12
N$119: LED7.A R16.1
RES: U$10.8
RES1: U$10.14
RESET: U$10.5
RS: IC4.11 U1.4
RSSI: R41.2 U$10.6
RTS: U$10.16
RX: BLUETOOTH.3 Q3.3 R38.1 S11.9
RXLED: LED2.C U$1.8
S_D10: IC6.1 S6.4
S_D11: IC6.12 S6.5
S_D12: IC6.13 S6.6
SCK: 74HC4050.7 74HC4050.9 S14.5
SCL: IC4.1 R35.1 S11.12 S12.20 U2.6 U$7.6
SDA: IC4.2 R32.1 S11.11 S12.19 U2.5 U$7.5
SQW: U$7.7
TX: BLUETOOTH.4 Q4.3 R40.1 S11.10
TXLED: LED8.C U$1.22
VCC: C28.+ IC1.1 Q1.2 R36.1 U$4.VIN
VUSB: C19.1 C20.A FDN340.1 L1.2 U$1.7